# EAGLE board SafeRC_PCB (EAGLE 8.3.2)
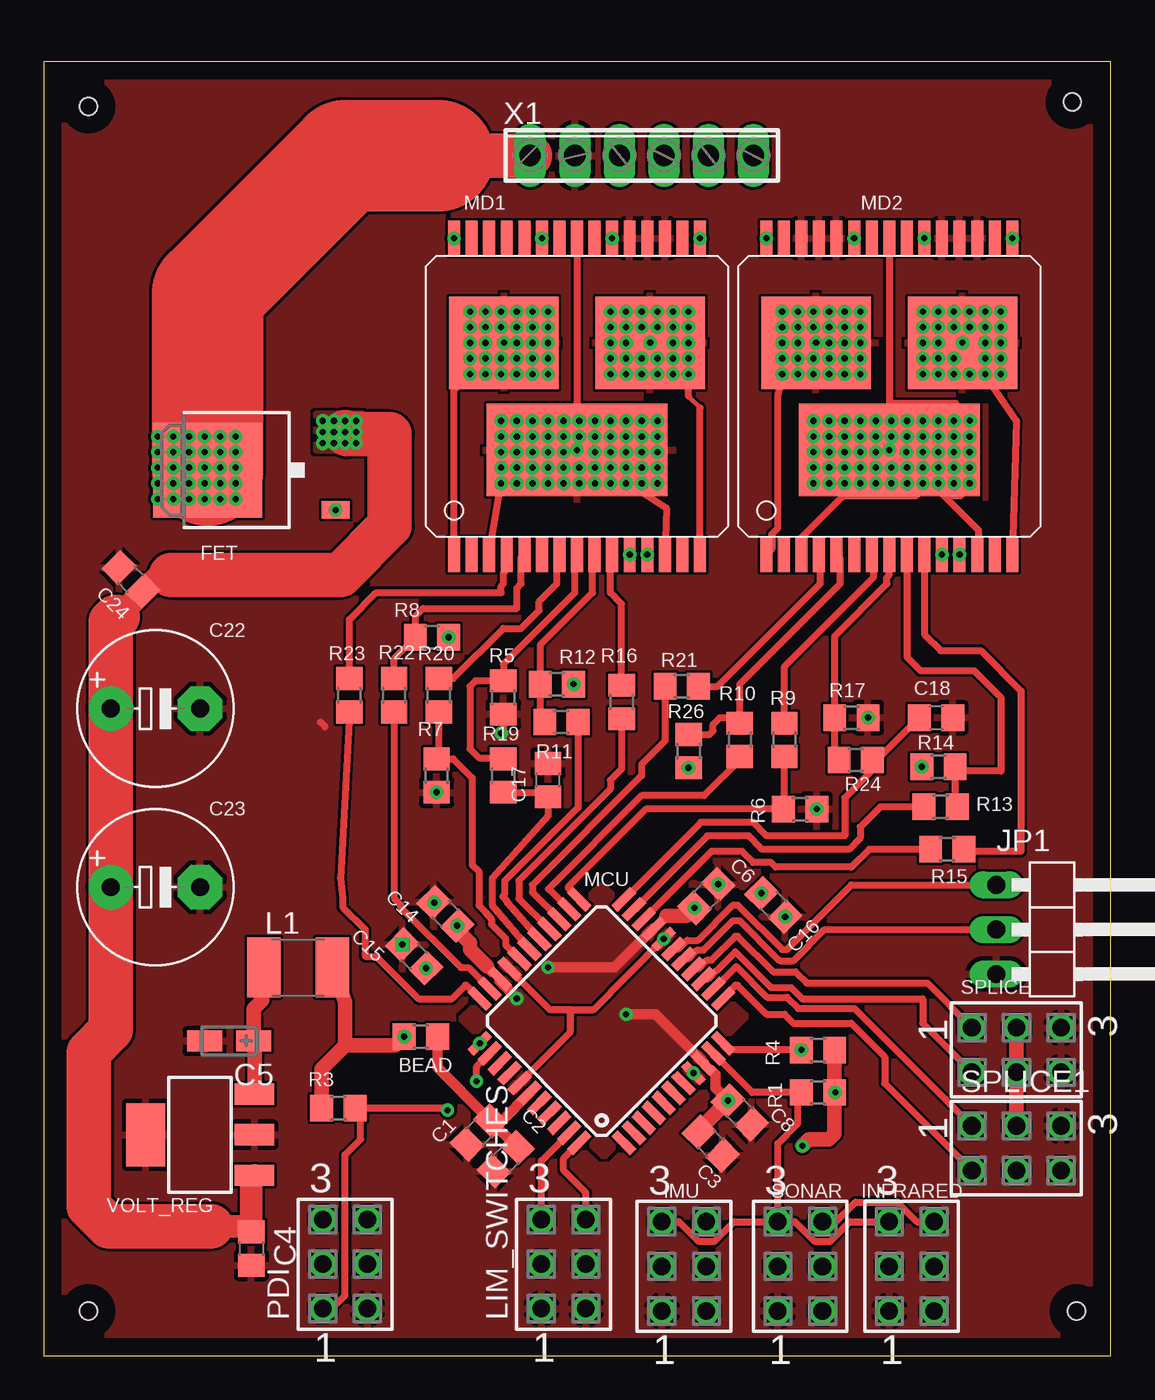
[diagram p0: board, top side]
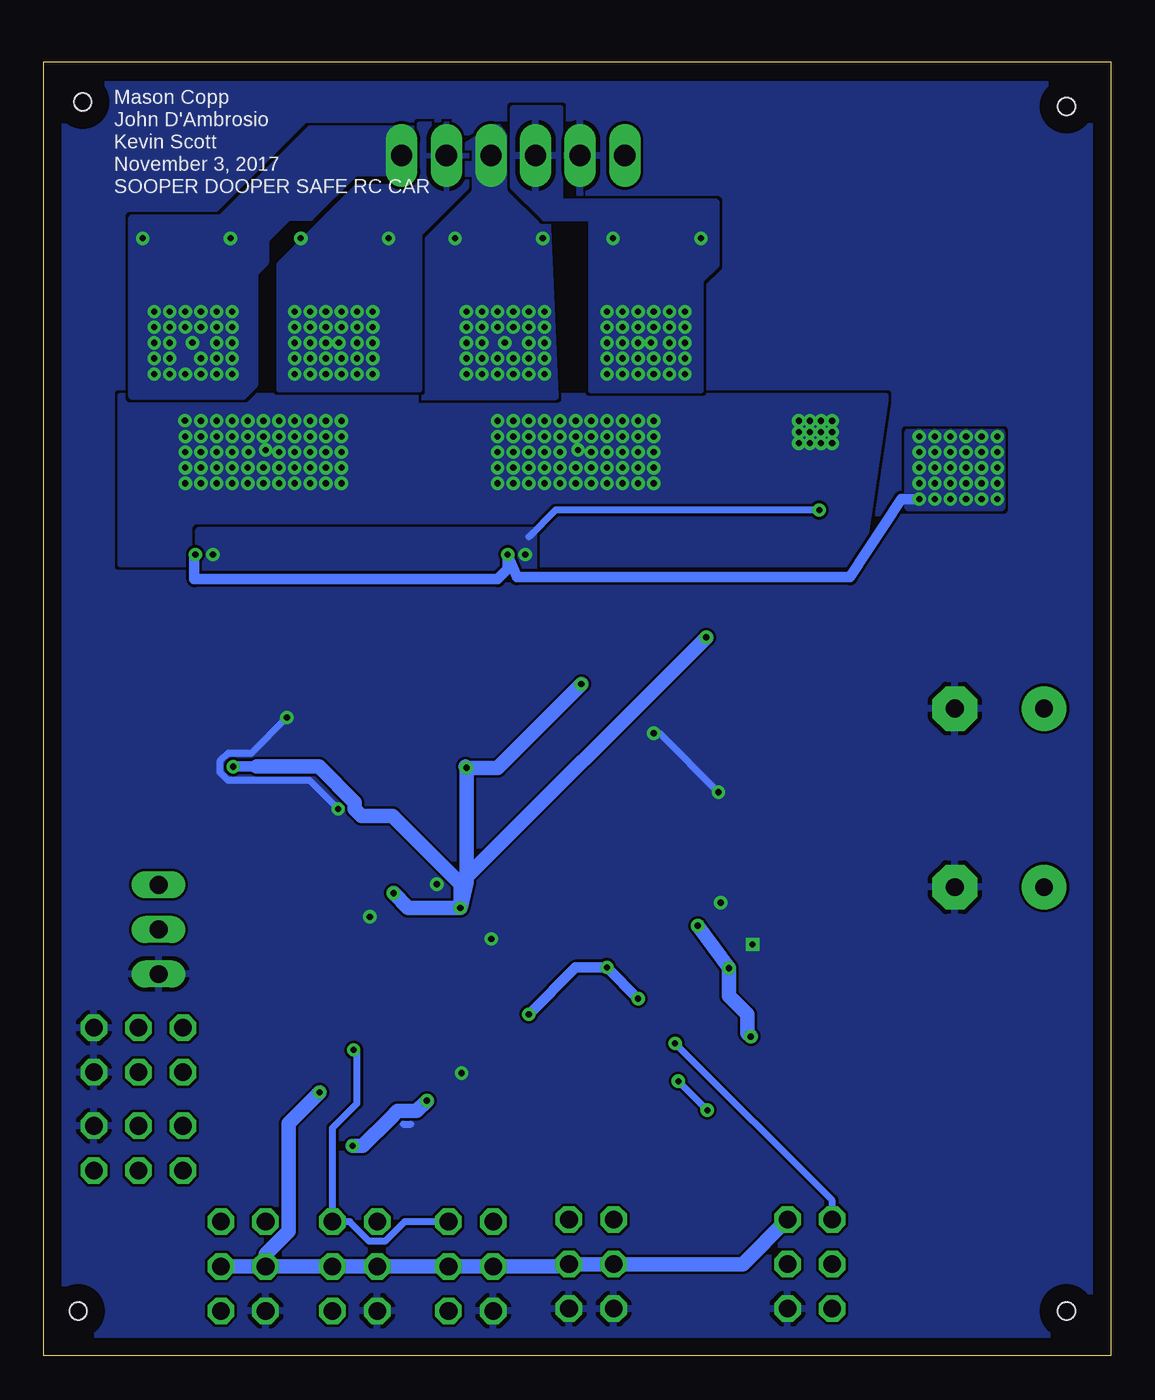
[diagram p1: board, bottom side, seen from below]

Size 60.76 x 73.65 mm. Coordinates in mm from the lower left corner, seen from the top.
Outline: 0,0 60.76,0 60.76,73.65 0,73.65 0,0
Copper layers (1*16): Top 0.035mm / dielectric 1.5mm / Bottom 0.035mm
Design rules "default": minimum track width 6mil, minimum drill 0.35mm, track to track 6mil, track to pad 6mil, pad to pad 6mil, via to via 6mil, smd to smd 6mil, copper to edge 40mil, drill to drill 6mil, minimum pad ring 10mil, minimum via ring 8mil, stop-mask expansion 4mil, vias tented up to drill 0mil, thermal gap 10mil
Holes 1 mm at 58.55,71.37 2.54,71.12 2.54,2.54 58.8,2.54

## Footprints (pad centres in the part's own frame; a part is rotated, then mirrored left to right if it is on the bottom)
R0805 = smd 1.3 x 1.5: 1 -0.95,0; 2 0.95,0
C0805 = smd 1.3 x 1.5: 1 -0.95,0; 2 0.95,0
CT3216 = smd 2 x 1.2: + -1.4,0; - 1.4,0
E5-8,5 = drill 1.016 pad 2.54: + -2.54,0 | drill 1.016 pad 2.54 octagon: - 2.54,0
TO252 = smd 1 x 1.6: 1 -2.28,-4.8; 2 2.28,-4.8 | smd 5.4 x 6.2: 3 0,2.5
SSW-102-02-S-T = drill 1 pad 1.5 octagon: 1 -1.27,-2.54; 2 -1.27,0; 3 -1.27,2.54; 4 1.27,-2.54; 5 1.27,0; 6 1.27,2.54
1X03/90 = drill 1.016 long: 1 -2.54,-3.81; 2 0,-3.81; 3 2.54,-3.81
L1812 = smd 1.9 x 3.4: 1 -1.95,0; 2 1.95,0
TQFP44 = smd 1.5 x 0.5: 1 -5.8,4; 2 -5.8,3.2; 3 -5.8,2.4; 4 -5.8,1.6; 5 -5.8,0.8; 6 -5.8,0; 7 -5.8,-0.8; 8 -5.8,-1.6; 9 -5.8,-2.4; 10 -5.8,-3.2; 11 -5.8,-4; 23 5.8,-4; 24 5.8,-3.2; 25 5.8,-2.4; 26 5.8,-1.6; 27 5.8,-0.8; 28 5.8,0; 29 5.8,0.8; 30 5.8,1.6; 31 5.8,2.4; 32 5.8,3.2; 33 5.8,4 | smd 0.5 x 1.5: 12 -4,-5.8; 13 -3.2,-5.8; 14 -2.4,-5.8; 15 -1.6,-5.8; 16 -0.8,-5.8; 17 0,-5.8; 18 0.8,-5.8; 19 1.6,-5.8; 20 2.4,-5.8; 21 3.2,-5.8; 22 4,-5.8; 34 4,5.8; 35 3.2,5.8; 36 2.4,5.8; 37 1.6,5.8; 38 0.8,5.8; 39 0,5.8; 40 -0.8,5.8; 41 -1.6,5.8; 42 -2.4,5.8; 43 -3.2,5.8; 44 -4,5.8
MULTIPOWERSO-30 = smd 0.68 x 2: 1 -7,-9; 2 -6,-9; 3 -5,-9; 4 -4,-9; 5 -3,-9; 6 -2,-9; 7 -1,-9; 8 0,-9; 9 1,-9; 10 2,-9; 11 3,-9; 12 4,-9; 13 5,-9; 14 6,-9; 15 7,-9; 16 7,9; 17 6,9; 18 5,9; 19 4,9; 20 3,9; 21 2,9; 22 1,9; 23 0,9; 24 -1,9; 25 -2,9; 26 -3,9; 27 -4,9; 28 -5,9; 29 -6,9; 30 -7,9 | smd 10.3 x 5.25: HS1 0,-3.05 | smd 6.23 x 5.25: HS2 -4.165,3.05; HS3 4.165,3.05
SOT223 = smd 1.219 x 2.235: 1 -2.311,-3.099; 2 0,-3.099; 3 2.311,-3.099 | smd 3.6 x 2.2: 4 0,3.099
6POL254 = drill 1.2 pad 1.778 long: 1 -6.35,0; 2 -3.81,0; 3 -1.27,0; 4 1.27,0; 5 3.81,0; 6 6.35,0

## Placement (x,y rotation side)
BEAD  BEAD  [R0805]  21.46,18.16 0 top
C1  10uF  [C0805]  24.76,12.7 225 top
C2  100nF  [C0805]  26.29,11.18 225 top
C3  10uF  [C0805]  37.97,12.06 315 top
C4  10uF  [C0805]  11.81,6.1 270 top
C5  3.3uF  [CT3216]  10.54,17.91 180 top
C6  100nF  [C0805]  37.72,26.16 45 top
C8  100nF  [C0805]  39.62,13.84 315 top
C14  100nF  [C0805]  22.86,25.15 135 top
C15  10uF  [C0805]  21.08,22.73 135 top
C16  10uF  [C0805]  41.53,25.65 315 top
C17  33nF  [C0805]  28.7,32.77 90 top
C18  33nF  [C0805]  50.8,36.32 0 top
C22  470uF  [E5-8,5]  6.35,36.83 0 top
C23  470uF  [E5-8,5]  6.35,26.67 0 top
C24  0.1uF  [C0805]  4.95,44.2 135 top
FET  FDD4141TO252  [TO252]  11.81,50.42 90 top
IMU  SSW-102-02-S-T  [SSW-102-02-S-T]  36.45,5.08 0 top
INFRARED  SSW-102-02-S-T  [SSW-102-02-S-T]  49.4,5.08 0 top
JP1  [1X03/90]  58.04,24.26 270 top
L1  10uH  [L1812]  14.48,22.1 0 top
LIM_SWITCHES  SSW-102-02-S-T  [SSW-102-02-S-T]  29.59,5.21 0 top
MCU  XMEGA16A4A  [TQFP44]  31.75,19.05 135 top
MD1  VNH5019  [MULTIPOWERSO-30]  30.35,54.61 0 top
MD2  VNH5019  [MULTIPOWERSO-30]  48.13,54.61 0 top
PDI  SSW-102-02-S-T  [SSW-102-02-S-T]  17.14,5.21 0 top
R1  4.7kOHM  [R0805]  44.07,14.99 0 top
R3  10kOhm  [R0805]  16.76,14.1 0 top
R4  4.7kOHM  [R0805]  44.07,17.4 0 top
R5  1kOHM  [R0805]  26.16,37.46 90 top
R6  10kOHM  [R0805]  43.05,31.12 180 top
R7  10kOHM  [R0805]  22.35,33.02 90 top
R8  4.7kOHM  [R0805]  22.1,40.89 180 top
R9  1kOHM  [R0805]  42.16,35.05 90 top
R10  1kOHM  [R0805]  39.62,35.05 90 top
R11  1kOHM  [R0805]  29.46,36.07 180 top
R12  4.7kOHM  [R0805]  29.21,38.23 180 top
R13  1kOHM  [R0805]  51.05,31.24 0 top
R14  4.7kOHM  [R0805]  50.93,33.53 0 top
R15  1kOHM  [R0805]  51.44,28.83 0 top
R16  1kOHM  [R0805]  32.89,37.21 90 top
R17  1kOHM  [R0805]  45.97,36.32 180 top
R19  10kOHM  [R0805]  26.16,33.02 90 top
R20  1kOHM  [R0805]  22.48,37.59 90 top
R21  1kOHM  [R0805]  36.32,38.1 0 top
R22  [R0805]  19.94,37.59 90 top
R23  [R0805]  17.4,37.59 90 top
R24  10kOHM  [R0805]  46.23,33.91 180 top
R26  4.7kOHM  [R0805]  36.7,34.42 90 top
SONAR  SSW-102-02-S-T  [SSW-102-02-S-T]  43.05,5.08 0 top
SPLICE  SSW-102-02-S-T  [SSW-102-02-S-T]  55.37,17.4 270 top
SPLICE1  SSW-102-02-S-T  [SSW-102-02-S-T]  55.37,11.81 270 top
VOLT_REG  [SOT223]  8.89,12.57 90 top
X1  [6POL254]  34.04,68.33 0 top

## Library data of the parts
BEAD C1-C6 C8 C14-C18 C22-C24 L1 R1 R3-R17 R19-R24 R26 = rcl
FET = transistor-fet
IMU INFRARED LIM_SWITCHES PDI SONAR SPLICE SPLICE1 = con-samtec; OC_FARNELL: unknown; OC_NEWARK: unknown
JP1 = pinhead
MCU = atmel; OC_FARNELL: unknown; OC_NEWARK: unknown
MD1 MD2 = ME507
VOLT_REG = ME507; MPN: LT1129CST-5#PBF; OC_FARNELL: 1663375; OC_NEWARK: 57M2069
X1 = con-phoenix-254; OC_FARNELL: unknown; OC_NEWARK: unknown

## Nets
AVCC: BEAD.2 C1.1 C2.1 MCU.39
CLK: MCU.35 PDI.1 R3.2
CP: FET.1 MD1.11 MD2.11
CS1: MD1.8 R5.2 R19.2
CS2: MD2.8 R17.2 R24.2
DATA: MCU.34 PDI.3
ENA1: MD1.5 R8.2 R22.2
ENA2: MD2.5 R10.2 R26.2
ENB1: MD1.9 R11.2 R12.2
ENB2: MD2.9 R13.2 R14.2
ESC_IN: MCU.12 SPLICE1.4
ESC_OUT: MCU.14 SPLICE.4
GND: C1.2 C2.2 C3.2 C4.2 C5.- C6.2 C8.2 C14.2 C15.2 C16.2 C17.2 C18.2 C22.- C23.- C24.2 IMU.1 INFRARED.1 JP1.3 LIM_SWITCHES.1 LIM_SWITCHES.4 MCU.8 MCU.18 MCU.30 MCU.38 MD1.18 MD1.19 MD1.20 MD2.18 MD2.19 MD2.20 MD2.26 MD2.27 MD2.28 PDI.4 R5.1 R6.1 R7.1 R17.1 SONAR.1 SPLICE1.3 SPLICE.3 SPLICE.6 VOLT_REG.2 VOLT_REG.4 X1.2
INA1: MD1.4 R23.2
INA2: MD2.4 R21.2
INB1: MD1.10 R16.2
INB2: MD2.10 R15.2
MVCC: C4.1 C22.+ C23.+ C24.1 FET.2 MD1.3 MD1.13 MD1.23 MD1.HS1 MD2.3 MD2.13 MD2.23 MD2.HS1 VOLT_REG.1
N$1: C5.+ L1.1 VOLT_REG.3
N$4: PDI.2
N$5: PDI.5
OUTA1: MD1.1 MD1.25 MD1.30 MD1.HS2 X1.3
OUTA2: MD2.1 MD2.25 MD2.30 MD2.HS2 X1.5
OUTB1: MD1.15 MD1.16 MD1.21 MD1.HS3 X1.4
OUTB2: MD2.15 MD2.16 MD2.21 MD2.HS3 X1.6
PA0: MCU.40
PA1: MCU.41
PA2: MCU.42
PA3: LIM_SWITCHES.3 MCU.43
PA4: LIM_SWITCHES.6 MCU.44
PA5: MCU.1
PA6: MCU.2
PA7: MCU.3
PB0: MCU.4
PB1: MCU.5
PB2: MCU.6
PB3: MCU.7
PD0: MCU.20 R15.1
PD1: MCU.21 R13.1
PD2: C18.1 MCU.22 R24.1
PD3: MCU.23 R6.2 R9.1
PD4: MCU.24 R10.1
PD5: MCU.25 R21.1
PD6: MCU.26 R16.1
PD7: MCU.27 R11.1
PE0: C17.1 MCU.28 R19.1
PE1: MCU.29 R7.2 R20.1
PE2: MCU.32 R22.1
PE3: MCU.33 R23.1
PWM1: MD1.7 R20.2
PWM2: MD2.7 R9.2
RX: JP1.1 MCU.17
SCL: IMU.6 INFRARED.6 MCU.11 R4.1 SONAR.6
SDA: IMU.3 INFRARED.3 MCU.10 R1.1 SONAR.3
SERVO_ESC_POW: SPLICE1.2 SPLICE.2 SPLICE.5
SERVO_IN: MCU.13 SPLICE1.1
SERVO_OUT: MCU.15 SPLICE.1
TX: JP1.2 MCU.16
VBAT: FET.3 MD1.12 MD2.12 X1.1
VCC: BEAD.1 C3.1 C6.1 C8.1 C14.1 C15.1 C16.1 IMU.2 IMU.5 INFRARED.2 INFRARED.5 L1.2 LIM_SWITCHES.2 LIM_SWITCHES.5 MCU.9 MCU.19 MCU.31 PDI.6 R1.2 R3.1 R4.2 R8.1 R12.1 R14.1 R26.1 SONAR.2 SONAR.5

## Tracks (layer width: path | path; a pad name or v marks a point on that pad's centre or on a via)
AVCC
  Top 0.61: MCU.39 26.07,13.37 C1.1 C2.1 | BEAD.2 22.41,16.4 25.18,13.63
  Top 0.813: 25.18,13.63 C1.1
CLK  (via drill 0.35)
  Top 0.406: v22.99,13.97 22.86,14.1 R3.2 18.03,13.78 18.03,12.32 17.14,11.43 17.14,3.43 16.38,2.67 PDI.1 | v24.64,15.62 24.64,16.46 MCU.35
  Bottom 0.406: v22.99,13.97 v24.64,15.62
CP  (via drill 0.35)
  Bottom 0.406: FET.1 31.62,48.14 33.15,46.61
  other vias: 16.61,48.14 33.35,45.61 51.13,45.61
  pour Bottom (rank 2): 32.89,46.99 32.89,44.45 51.94,44.45 51.94,46.99
CS1
  Top 0.406: MD1.8 30.23,45.48 30.23,43.43 26.16,39.37 R5.2 24.57,38.41 24.26,38.1 24.26,34.54 24.76,34.04 26.1,34.04 R19.2
CS2
  Top 0.406: MD2.8 48.13,44.45 48.01,44.32 48.01,43.94 45.02,40.96 R17.2 45.02,34.16 R24.2
DATA  (via drill 0.35)
  Bottom 0.406: PDI.3 15.88,8.83 MCU.34
  other vias: 24.82,17.78
ENA1
  Top 0.406: MD1.5 27.18,45.43 27.18,43.94 26.92,43.69 26.92,42.55 21.59,42.55 21.15,42.1 R8.2 19.94,39.68 R22.2
ENA2
  Top 0.406: R26.2 37.91,35.37 38.1,35.56 38.1,35.94 38.48,36.32 39.3,36.32 R10.2 39.62,38.23 45.34,43.94 45.34,45.4 MD2.5
ENB1
  Top 0.406: MD1.9 31.24,45.5 31.24,43.43 28.26,40.45 R12.2 28.26,36.32 R11.2
ENB2
  Top 0.406: MD2.9 49.13,39.77 49.91,38.99 52.96,38.99 54.48,37.46 54.48,33.27 52.13,33.27 R14.2 51.88,31.37 R13.2
ESC_IN
  Top 0.406: MCU.12 38.68,20.39 39.37,21.08 39.5,21.08 41.15,19.43 42.16,19.43 42.67,18.92 45.97,18.92 47.88,17.02 47.88,15.49 SPLICE1.4
ESC_OUT
  Top 0.406: MCU.14 37.82,21.45 38.32,21.95 38.33,21.95 39.37,22.99 41.4,20.95 42.55,20.95 43.18,20.32 50.04,20.32 50.04,18.92 SPLICE.4
GND  (via drill 0.35)
  Top 0.406: 15.75,36.07 16,35.81 | R5.1 26.16,35.56 v26.04,35.43 | MCU.30 26.52,22 28.83,19.69 29.97,19.69 | 29.97,19.69 31.3,19.69 MCU.18 | MCU.38 27.08,15.53 29.97,18.41 29.97,19.69
  Bottom 0.406: v26.04,35.43 25.71,35.43 R7.1 | R6.1 45.65,32.77 50.29,32.77 50.74,33.21 50.74,33.84 50.29,34.29 48.96,34.29 R17.1 | C8.2 39.86,13.17
  other vias: 22.35,32.07 46.92,36.32 44,31.12 36.98,16.08 20.41,23.4 22.22,25.78 35.29,23.72 42.2,24.98 38.39,26.83
  pour Top (rank 2): -10.67,73.66 -10.67,0 69.85,0 69.85,73.66
  pour Bottom (rank 6): -11.56,72.39 -11.56,0 72.39,0 72.39,72.39
INA1
  Top 0.406: MD1.4 26.35,44.77 26.16,44.58 26.16,43.94 26.04,43.81 26.04,43.43 18.92,43.43 17.4,41.91 R23.2
INA2
  Top 0.406: R21.2 38.35,38.1 44.2,43.94 44.2,45.55 MD2.4
INB1
  Top 0.406: R16.2 32.89,42.8 32.26,43.43 32.26,45.52 MD1.10
INB2
  Top 0.406: MD2.10 50.13,41.05 51.05,40.13 53.34,40.13 55.63,37.85 55.63,28.7 52.51,28.7 R15.2
MVCC  (via drill 0.35)
  Top 0.254: 52.6,49.26 52.22,48.87 51.67,48.87 v49.11,51.43 48.43,51.43 50.06,49.8 50.06,49.26 49.68,48.87 45.45,48.87 | 48.13,54.27 51.94,54.27 v52.73,53.23 | MD2.3 43.13,46.56
  Top 0.406: MD2.13 53.21,45.69 53.21,46.99 48.64,51.56 MD2.HS1 MD2.23 | 43.13,46.56 45.45,48.87 | MD1.23 MD1.HS1 35.43,48.26 MD1.13 | MD1.3 v26.04,49.66
  Top 1.27: 4.19,42.04 5.62,43.47 C24.1 5.68,43.52 6.48,44.32 7.11,44.32 7.24,44.45 | 9.53,7.37 11.49,7.37 C4.1 11.81,10.08 VOLT_REG.1
  Top 2.54: 4.19,42.04 4.06,42.04 3.81,41.78 C22.+ C23.+ 3.81,18.54 2.54,17.27 2.54,8.51 3.68,7.37 9.53,7.37 | 7.24,44.45 16.89,44.45 19.68,47.24 19.68,52.45 17.27,52.45 v17.14,52.58
  other vias: 43.82,53.21 44.7,53.21 45.59,53.21 46.48,53.21 47.37,53.21 48.26,53.21 49.15,53.21 50.04,53.21 50.93,53.21 51.82,53.21 52.71,52.32 51.82,52.32 50.93,52.32 50.04,52.32 49.15,52.32 48.26,52.32 47.37,52.32 46.48,52.32 45.59,52.32 44.7,52.32 43.82,52.32 43.82,51.43 44.7,51.43 45.59,51.43 46.48,51.43 47.37,51.43 48.13,51.56 50.04,51.43 50.93,51.43 51.82,51.43 52.71,51.43 52.71,50.55 51.82,50.55 50.93,50.55 50.04,50.55 49.15,50.55 48.26,50.55 46.48,50.55 47.37,50.55 45.59,50.55 44.7,50.55 43.82,50.55 43.82,49.66 44.7,49.66 45.59,49.66 46.48,49.66 47.37,49.66 48.26,49.66 49.15,49.66 50.04,49.66 50.93,49.66 51.82,49.66 52.71,49.66 26.04,53.21 26.92,53.21 27.81,53.21 28.7,53.21 29.59,53.21 30.48,53.21 31.37,53.21 32.26,53.21 33.15,53.21 34.04,53.21 34.92,53.21 34.92,52.32 34.92,51.43 34.92,50.55 34.92,49.66 34.04,49.66 33.15,49.66 32.26,49.66 31.37,49.66 30.48,49.66 29.59,49.66 28.7,49.66 27.81,49.66 26.92,49.66 26.04,50.55 26.04,51.43 26.04,52.32 26.92,52.32 27.81,52.32 28.7,52.32 29.59,52.32 30.48,52.32 31.37,52.32 32.26,52.32 33.15,52.32 34.04,52.32 34.04,51.43 34.04,50.55 33.15,50.55 32.26,50.55 31.37,50.55 30.48,50.55 29.59,50.55 28.7,50.55 27.81,50.55 26.92,50.55 26.92,51.43 27.81,51.43 28.7,51.43 29.59,51.43 30.35,51.56 31.37,51.43 32.26,51.43 33.15,51.43 15.88,53.21 16.51,53.21 17.14,53.21 17.78,53.21 17.78,52.58 16.51,52.58 15.88,52.58 15.88,51.94 16.51,51.94 17.14,51.94 17.78,51.94
  pour Bottom (rank 5, no thermals): 12.83,54.61 56.39,54.61 56.39,45.09 14.22,45.09
  pour Top: 15.49,53.59 15.49,51.56 18.16,51.56 18.16,53.59
  pour Top: 25.15,54.1 25.15,48.77 35.81,48.77 35.81,54.1
N$1
  Top 0.813: L1.1 12.43,20.22 11.94,19.74 C5.+ 11.99,17.86 VOLT_REG.3
N$2
  pour Top: 42.93,54.1 42.93,48.77 53.59,48.77 53.59,54.1
OUTA1  (via drill 0.35)
  Top 0.406: v24.26,55.88 23.35,54.98 MD1.1
  other vias: 28.35,63.61 23.35,63.61 25.15,59.44 26.04,59.44 26.92,59.44 27.81,59.44 28.7,59.44 28.7,58.55 28.7,57.66 28.7,56.77 28.7,55.88 27.81,55.88 26.92,55.88 26.04,55.88 25.15,55.88 24.26,56.77 24.26,57.66 24.26,58.55 24.26,59.44 25.15,58.55 26.04,58.55 26.92,58.55 27.81,58.55 27.81,57.66 27.81,56.77 26.92,56.77 26.04,56.77 25.15,56.77 25.15,57.66 26.19,57.66 26.92,57.66
  pour Top: 23.37,60.32 23.37,55.12 29.21,55.12 29.21,60.32
  pour Bottom: 23.37,54.99 23.37,61.21 22.48,62.1 22.48,65.66 31.37,65.66 31.37,70.99 34.04,70.99 34.04,66.55 32.26,64.77 29.59,64.77 29.59,54.99
OUTA2  (via drill 0.35)
  Top 0.406: MD2.1 41.44,45.91 41.44,46.76 41.78,47.1 41.78,54.61 v42.04,55.88
  other vias: 46.13,63.61 41.13,63.61 42.04,59.44 42.93,59.44 43.82,59.44 44.7,59.44 45.59,59.44 46.48,59.44 46.48,58.55 46.48,57.66 46.48,56.77 46.48,55.88 45.59,55.88 44.7,55.88 43.82,55.88 42.93,55.88 42.04,56.77 42.04,57.66 42.04,58.55 42.93,58.55 43.82,58.55 44.7,58.55 45.59,58.55 45.59,57.66 44.7,57.66 43.97,57.66 42.93,57.66 42.93,56.77 43.82,56.77 44.7,56.77 45.59,56.77
  pour Top: 41.15,60.32 41.15,54.99 47.37,54.99 47.37,60.32
  pour Bottom: 36.7,70.1 36.7,66.55 39.37,63.88 39.37,54.99 47.37,54.99 47.37,62.1 42.93,66.55 39.37,66.55 39.37,70.1
OUTB1  (via drill 0.35)
  Top 0.254: 37.35,53.96 36.7,54.61
  Top 0.406: MD1.15 37.35,53.96 | 36.7,54.61 v36.7,55.88
  other vias: 32.35,63.61 37.35,63.61 32.26,59.44 33.15,59.44 34.04,59.44 34.92,59.44 35.81,59.44 36.7,59.44 36.7,58.55 36.7,57.66 36.7,56.77 35.81,55.88 34.92,55.88 34.04,55.88 33.15,55.88 32.26,55.88 32.26,56.77 32.26,57.66 32.26,58.55 33.15,58.55 34.04,58.55 34.92,58.55 35.81,58.55 35.81,57.66 35.81,56.77 34.92,56.77 34.04,56.77 33.15,56.77 33.15,57.66 34.52,57.66
  pour Bottom (rank 3, no thermals): 31.62,54.61 32.13,66.17 34.92,69.98 39.24,67.31 39.24,54.61
  pour Top: 31.37,60.32 31.37,54.99 37.59,54.99 37.59,60.32
OUTB2  (via drill 0.35)
  Top 0.406: MD2.HS3 55.37,53.21 MD2.15
  other vias: 50.13,63.61 55.13,63.61 50.04,59.44 50.93,59.44 51.82,59.44 52.71,59.44 53.59,59.44 54.48,59.44 54.48,58.55 53.59,58.55 52.3,57.66 51.82,58.55 50.93,58.55 50.04,58.55 50.04,57.66 50.93,57.66 53.59,57.66 54.48,57.66 54.48,56.77 53.59,56.77 51.82,56.77 50.93,56.77 50.04,56.77 50.04,55.88 50.93,55.88 51.82,55.88 52.71,55.88 53.59,55.88 54.48,55.88 52.71,58.55
  pour Bottom (rank 2, no thermals): 39.24,67.31 43.05,67.31 45.59,64.77 46.86,64.77 48.13,63.5 48.13,62.23 48.77,61.59 48.77,55.24 49.4,54.61 55.75,54.61 55.75,64.77 50.67,64.77 45.59,69.85 39.24,69.85
  pour Top: 49.15,60.32 49.15,54.99 55.37,54.99 55.37,60.32
PA3
  Top 0.406: LIM_SWITCHES.3 28.32,11.1 MCU.43
PA4
  Top 0.406: LIM_SWITCHES.6 30.86,9.27 29.59,10.54 29.59,11.23 MCU.44
PD0
  Top 0.406: R15.1 46.99,28.83 45.97,27.81 41.66,27.81 41.4,28.07 40.39,28.07 39.75,28.7 38.01,28.7 MCU.20
PD1
  Top 0.406: R13.1 47.62,31.24 46.48,30.1 46.48,29.46 45.85,28.83 40.89,28.83 40.13,29.59 37.77,29.59 MCU.21
PD2
  Top 0.406: C18.1 47.44,33.91 R24.1 47.18,33.34 45.59,31.75 45.59,29.59 41.15,29.59 40.39,30.35 37.4,30.35 MCU.22
PD3
  Top 0.406: R9.1 42.16,31.18 R6.2 34.29,31.12 29.84,26.67 29.84,26.61 MCU.23
PD4
  Top 0.406: R10.1 39.62,33.91 37.59,31.88 34.04,31.88 28.7,26.54 28.78,26.54 MCU.24
PD5
  Top 0.406: R21.1 35.37,34.99 34.04,33.66 34.04,33.02 27.81,26.8 27.81,26.38 MCU.25
PD6
  Top 0.406: R16.1 32.89,33.4 32.26,32.77 32.26,32.26 27.05,27.05 27.05,26.01 MCU.26
PD7
  Top 0.406: R11.1 30.41,31.2 26.24,27.03 26.24,26.29 26.14,26.14 26.39,25.8 MCU.27
PE0
  Top 0.406: MCU.28 25.53,25.65 25.53,27.18 28.7,30.73 C17.1 28.45,32.07 R19.1
PE1
  Top 0.406: R20.1 22.48,34.1 R7.2 23.31,33.97 24.38,32.89 24.38,27.94 24.76,27.56 24.76,25.65 24.81,25.61 24.97,25.42 25.12,25.27 25.48,24.85 25.48,24.56 26.29,23.75 26.29,23.38 MCU.29
PE2
  Top 0.406: R22.1 19.94,26.03 20.32,25.65 20.32,25.53 23.75,22.1 24.18,22.1 MCU.32
PE3
  Top 0.406: R23.1 16.89,27.18 17.02,26.03 17.02,25.53 18.29,24.26 18.29,22.73 18.92,22.73 21.34,20.32 23.24,20.32 24,21.08 24.06,21.08 MCU.33
PWM1
  Top 0.406: R20.2 23.3,38.54 26.16,41.4 27.18,41.4 28.19,42.42 28.19,42.93 29.21,43.94 29.21,45.47 MD1.7
PWM2
  Top 0.406: R9.2 42.16,39.24 47.24,44.32 47.24,45.5 MD2.7
RX
  Top 0.406: MCU.17 36.13,23.15 36.62,23.65 37.24,23.65 39.24,25.65 39.5,25.65 42.04,23.11 42.29,23.11 45.97,26.8 JP1.1
SCL  (via drill 0.35)
  Top 0.406: R4.1 39.06,17.4 MCU.11 | SONAR.6 45.1,7.62 46.21,8.73 48.59,8.73 49.7,7.62 INFRARED.6
  Bottom 0.406: IMU.6 40.21,7.62 41.32,6.51 42.24,6.51 43.35,7.62 SONAR.6 44.32,12.95 42.93,14.35 42.93,17.21 R4.1
  other vias: 43.12,17.4
SDA
  Top 0.406: IMU.3 36.15,7.62 37.26,6.51 38.18,6.51 39.29,7.62 SONAR.3 | SONAR.3 42.75,7.62 43.86,6.51 44.78,6.51 45.89,7.62 INFRARED.3 | SONAR.3 41.78,12.06 42.93,13.21 42.93,14.79 R1.1 40.34,14.99 MCU.10
SERVO_ESC_POW
  Top 0.813: SPLICE.2 SPLICE.5 SPLICE1.2
SERVO_IN
  Top 0.406: MCU.13 38.16,20.89 39.42,22.15 41.17,20.4 42.31,20.4 42.95,19.76 46.15,19.76 SPLICE1.1
SERVO_OUT
  Top 0.406: MCU.15 37.26,22.02 37.76,22.52 38.01,22.52 39.37,23.88 39.5,23.88 41.53,21.84 42.8,21.84 43.43,21.21 50.29,21.21 SPLICE.1
TX
  Top 0.406: MCU.16 36.69,22.59 37.19,23.08 37.56,23.08 39.24,24.77 39.6,24.77 41.81,22.55 41.83,22.55 41.91,22.48 42.67,22.48 44.45,24.26 JP1.2
VBAT  (via drill 0.35)
  Top 2.54: 22.48,68.33 X1.1
  Top 6.35: FET.3 9.31,60.49 17.14,68.33 22.48,68.33
  Bottom 0.61: v10.92,48.77 11.94,48.77 14.86,44.32 33.83,44.32 MD1.12 34.35,44.77 34.92,44.2 52.2,44.2 52.2,45.55 MD2.12
  other vias: 6.48,48.77 6.48,49.66 6.48,50.55 6.48,51.43 6.48,52.32 7.37,52.32 7.37,51.43 7.37,50.55 7.37,49.66 7.37,48.77 8.26,48.77 8.26,49.66 8.26,50.55 8.26,51.43 8.26,52.32 9.14,51.43 9.14,50.55 9.14,48.77 10.03,48.77 10.03,49.66 10.03,51.43 10.03,52.32 10.92,51.43 10.92,50.55 10.92,49.66 34.35,45.61 52.13,45.61 9.14,52.32 10.92,52.32 10.03,50.55 9.14,49.66
  pour Bottom (no thermals): 6.22,48.26 11.56,48.26 11.56,52.58 6.22,52.58
  pour Top: 6.48,48.26 6.48,52.58 11.56,52.58 11.56,48.26
VCC  (via drill 0.35)
  Top 0.406: MCU.19 34.72,24.31 35.31,24.89 | 25.53,21.84 25.56,21.84 MCU.31 | MCU.9 37.58,16.65 37.97,16.26
  Top 0.61: 25.95,21.32 26.55,20.72 26.55,20.69 v26.92,20.32 | v28.7,22.1 32.48,22.1 34.7,24.31 | v33.15,19.43 34.81,19.43 37.59,16.65 | 35.31,24.89 35.43,25.02 | 25.22,22.15 25.53,21.84 | 37.97,16.26 38.23,16 38.23,15.24 C8.1
  Top 0.813: C3.1 37.3,12.86 C8.1 | v45.06,14.99 R1.2 | R1.2 45.02,12.63 44.7,12.32 43.56,12.32 v43.18,11.94 | R1.2 R4.2 | R3.1 15.81,16.32 17.14,17.65 | 17.14,17.65 17.14,20.15 L1.2 | 17.14,17.65 20,17.65 BEAD.1 | 35.43,25.02 36.58,25.02 C6.1 | C14.1 23.53,24.22 24.26,23.49 24.26,23.11 25.22,22.15
  Bottom 0.61: v26.92,20.32 v28.7,22.1 30.48,22.1 v33.15,19.43 | 48.64,33.53 R14.1
  Bottom 0.813: C14.1 C15.1 21.75,20.48 20.7,19.43 20.7,18.35 BEAD.1 | R26.1 34.92,33.47 R12.1 | 36.76,33.53 R26.1 | C8.1 39.54,13.93 39.55,13.93 40.61,13.93 41.06,13.49 42.61,11.94 v43.18,11.94 | INFRARED.2 48.13,5.76 46.82,7.08 46.82,13.22 v45.06,14.99 | INFRARED.2 SONAR.5 SONAR.2 IMU.5 IMU.2 30.99,5.08 LIM_SWITCHES.5 LIM_SWITCHES.2 20.95,5.21 PDI.6 | INFRARED.2 INFRARED.5 | R26.1 36.7,26.98 | 36.7,26.98 C6.1 | C6.1 37.05,26.89 R8.1 | C6.1 37.43,25.49 | 48.64,33.53 45.09,33.53 43.07,31.5 43.07,31.13 42.67,30.73 40.89,30.73 37.14,26.98 36.7,26.98 | C6.1 40.02,25.49 C16.1
  other vias: 20.51,18.16 21.75,22.06 23.53,24.47 36.7,33.47 30.16,38.23 23.05,40.89 49.98,33.53 38.95,14.51 37.05,25.49 40.86,26.33
  pour Top: 23.75,19.18 31.88,11.3 40.01,19.3 31.75,26.8

## Text on the board
bNames: Mason Copp | John D'Ambrosio | Kevin Scott | November 3, 2017 | SOOPER DOOPER SAFE RC CAR